# Altium PCB btn.PcbDoc
Units mil, origin at the board's own origin, x right, y up, seen from the top; angles counter-clockwise.
Board outline 6000 x 4000 mil, 2 copper layers (Top Layer, Bottom Layer); 16 components, 19 nets, 87 pads, 4 vias.
Unrouted connection lines stored in the file: 10.
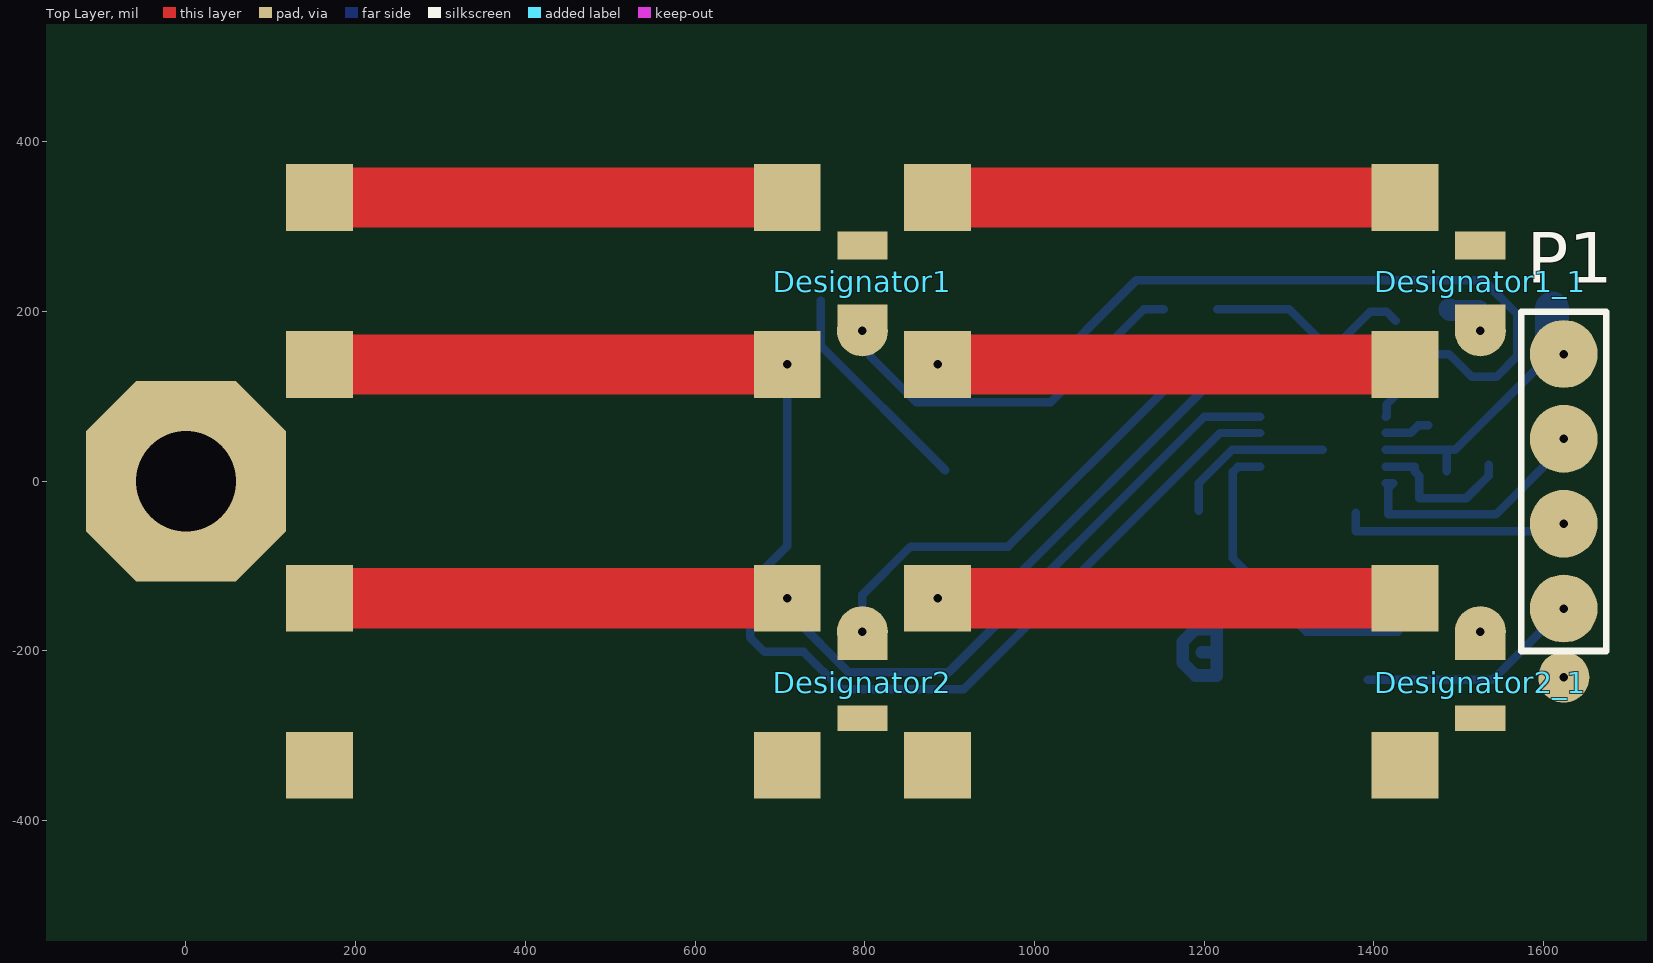
[diagram p0: Top Layer view]
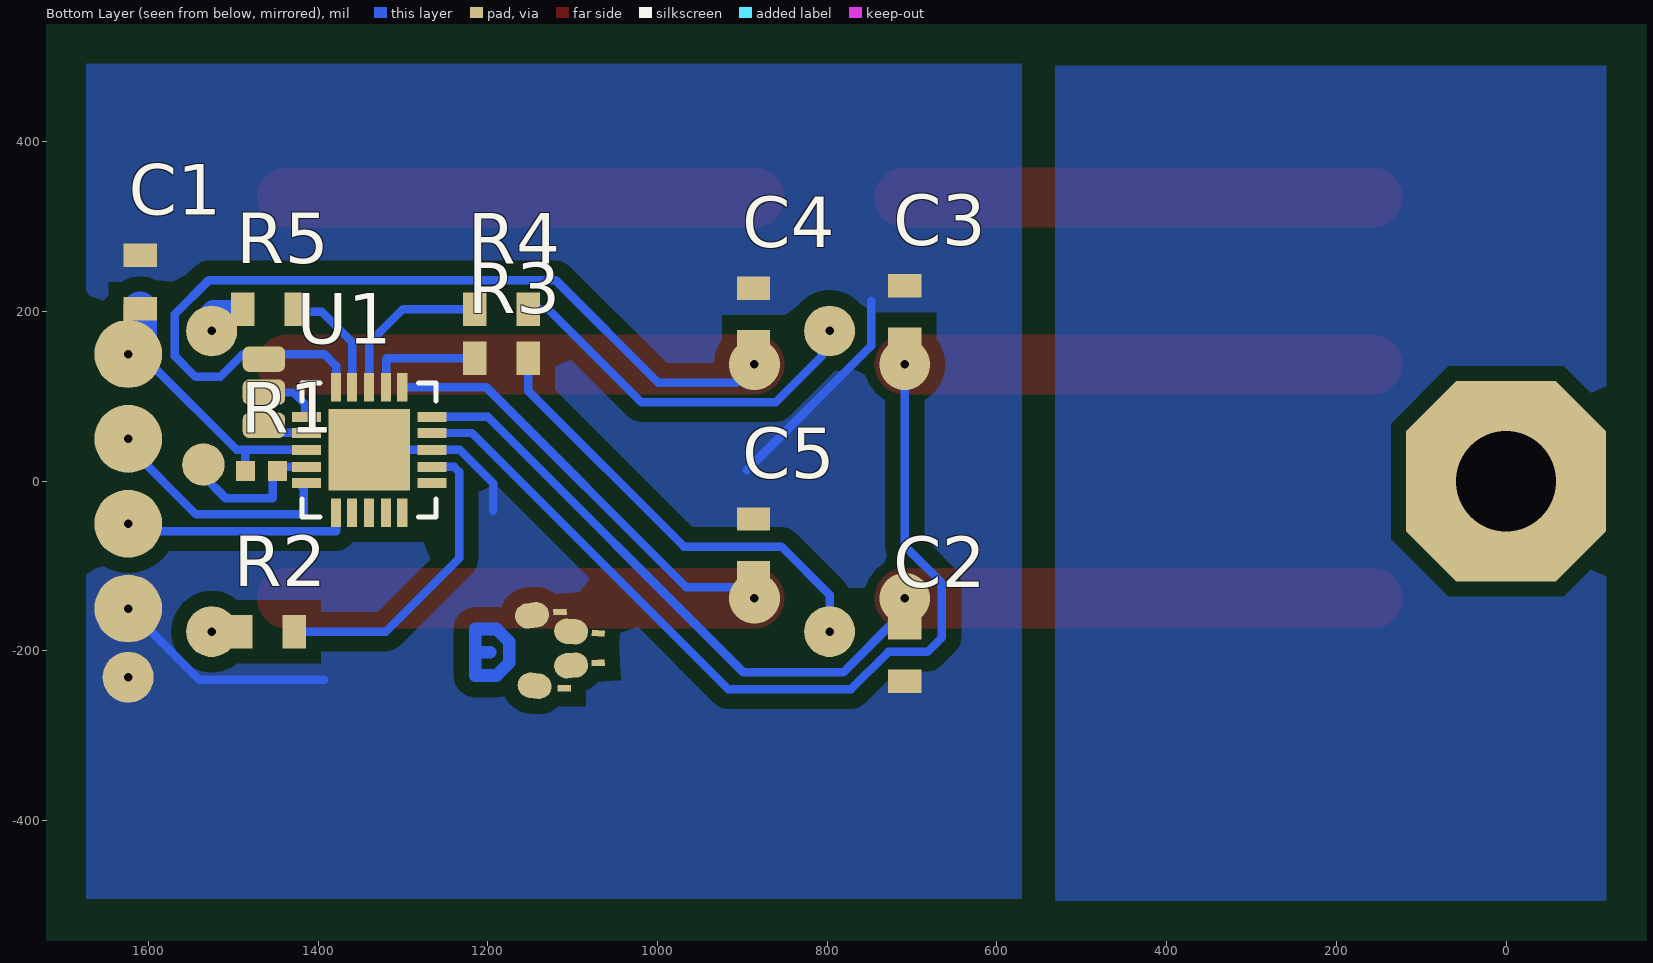
[diagram p1: Bottom Layer view, seen from below]

## Layer stack, top to bottom
Top Solder: solder mask 0.4, Solder Resist, Dk 3.5
Top Layer: signal copper 1.4
Dielectric 1: dielectric 12.6, FR-4, Dk 4.8
Bottom Layer: signal copper 1.4
Bottom Solder: solder mask 0.4, Solder Resist, Dk 3.5

## Board outline
-3970.47,-1017.72 2029.53,-1017.72 2029.53,2982.28 -3970.47,2982.28

## Design rules (kind name [scope] priority, off if disabled: settings)
Clearance [All] p1: gap=5 ignorepadtopadclearanceinfootprint=FALSE except(18: Arc-Fill Arc-Poly Arc-Region Track-Fill Track-Poly Track-Region SMDPad-Fill SMDPad-Poly SMDPad-Region THPad-Fill THPad-Poly THPad-Region Via-Fill Via-Poly Via-Region Fill-Fill Fill-Poly Fill-Region Poly-Poly Poly-Region Region-Region)
PolygonConnect [All] p1: connectstyle=Direct reliefconductorwidth=10 reliefentries=4 polygonreliefangle="90 Angle" airgapwidth=10
RoutingVias [All] p1: holewidth=28 width=50 viastyle="Through Hole" minholewidth=10 minwidth=50 maxholewidth=28 maxwidth=1000
SolderMaskExpansion [All] p1: expansion=4
Width [All] p1: maxlimit=500 minlimit=10 preferedwidth=10
30 further rules are at their usual default settings.

## Classes and differential pairs
component class btn: C1 C2 C3 C4 C5 P1 R1 R2 R3 R4 R5 U1

## Components (designator, comment, footprint, x,y, rotation, side; value= is the part's Value field where it differs from the comment)
C1 "Cap" 0603x 1610,235 r90 bottom value=100nF
C2 "Cap" 0603x 708.66,-204 r270 bottom value=100nF
C3 "Cap" 0603x 708.66,199 r90 bottom value=100nF
C4 "Cap" 0603x 887,196 r90 bottom value=100nF
C5 "Cap" 0603x 887,-76 r90 bottom value=100nF
Designator1 "Comment" 0805x 797.24,236.22 r90 top
Designator1_1 "Comment" 0805x 1525.59,236.22 r90 top
Designator2 "Comment" 0805x 797.24,-236.22 r90 top
Designator2_1 "Comment" 0805x 1525.59,-236.22 r90 top
P1 "Header 4" HDR1X4 1624.02,150 r270 top
R1 "" 0402x 1467.04,11.92 r180 bottom value=100
R2 "" 0603x 1460,-177.17 r0 bottom value=100
R3 "" 0603x 1184,145 r0 bottom value=100
R4 "" 0603x 1184,203 r0 bottom value=100
R5 "" 0603x 1457.5,203 r180 bottom value=100
U1 "ATTINY2313-20MU" *QFN50P400X400X80-21N 1340.04,36.92 r90 bottom

## Footprints (in the part's own frame and the unit in brackets; to place one, negate y for a bottom-side part, rotate by r counter-clockwise, add the part's x,y. Pads: shape width x height; smd on the part's side, far side on the other; paste and mask are expansions set on the pad)
0402x [mm] "Chip Capacitor, Body 1.0x0.5mm, IPC Medium Density"
  rect 0.57x0.6 smd: 1(-0.48,0) 2(0.48,0)
  body extent -0.5,-0.25 0.5,0.25, height 0.6
0603x [mm] "Chip Resistor; Body 1.6 x 0.8 mm (LxW typ)"
  rect 0.7x1 smd: 1(-0.8,0) 2(0.8,0)
0805x [mil] "Chip Resistor; Body 2 x 1.3 mm (LxW typ)"
  rect 33x59.06 smd: 1(42,0)
  rect 30x59.06 smd: 2(-43,0)
*QFN50P400X400X80-21N [mil]
  rect 34x12 smd: 1(-74,39) 2(-74,20) 3(-74,0) 4(-74,-20) 5(-74,-39) 11(74,-39) 12(74,-20) 13(74,0) 14(74,20) 15(74,39)
  rect 12x34 smd: 6(-39,-74) 7(-20,-74) 8(0,-74) 9(20,-74) 10(39,-74) 16(39,74) 17(20,74) 18(0,74) 19(-20,74) 20(-39,74)
  rect 96x96 smd: 21(0,0)
  silkscreen extent -79,-79 79,79
HDR1X4 [mil] "Connector; Header; 4 Position"
  round 80 hole 10: 1(0,0) 2(100,0) 3(200,0) 4(300,0)
  silkscreen extent -50,-50 350,50

## Part data
C1 C2 C3 C4 C5: "Capacitor", LatestRevisionDate=17-Jul-2002, LatestRevisionNote="Re-released for DXP Platform.", PackageDescription="Radial Cap, Thru-Hole; 2 Leads; 0.3 in Pin Spacing", PackageReference=RAD-0.3, Published=8-Jun-2000, Publisher="Altium Limited"
P1: "Header, 4-Pin", LatestRevisionDate=17-Jul-2002, LatestRevisionNote="Re-released for DXP Platform.", Publisher="Altium Limited"
R1 R2 R3 R4 R5: library part Res1, "Resistor", LatestRevisionDate=17-Jul-2002, LatestRevisionNote="Re-released for DXP Platform.", PackageDescription="Axial Device, Thru-Hole; 2 Leads; 0.3 in Pin Spacing", PackageReference=AXIAL-0.3, Published=8-Jun-2000, Publisher="Altium Limited"
U1: "ATtiny Series 20 MHz 2 KB Flash 128 B SRAM 8-Bit Microcontroller - QFN-20", Package="QFN-20 Microchip", Availability=Unavailable, MF=Microchip, MP=ATTINY2313-20MU, Price=None, SnapEDA_Link=https://www.snapeda.com/parts/ATTINY2313-20MU/Microchip/view-part/?ref=snap

## Free pads (board coordinates)
  oct 236.22x236.22 hole 118.11: 0(0,0)
  rect 15.75x7.87 smd far side rot 177: 0(1070,-214) 0(1115,-154)
  rect 15.75x7.87 smd far side rot 5: 0(1070,-179)
  oval 30x40 smd far side rot 85: 0(1102,-217)
  oval 30x40 smd far side rot 95: 0(1102,-177)
  rect 15.75x7.87 smd far side: 0(1110,-244)
  oval 30x40 smd far side rot 98: 0(1145,-241)
  oval 30x40 smd far side rot 82: 0(1148,-158)
  rect 78.74x78.74 smd: 1(708.66,334.65) 1(1437.01,334.65) 2(708.66,137.8) 2(1437.01,137.8) 3(708.66,-137.8) 3(1437.01,-137.8) 4(708.66,-334.65) 4(1437.01,-334.65) 5(157.48,-334.65) 5(885.83,-334.65) 6(157.48,-137.8) 6(885.83,-137.8) 7(157.48,137.8) 7(885.83,137.8) 8(157.48,334.65) 8(885.83,334.65)
  round 60 hole 10: 12(797.24,-177.17) 13(797.24,177.17) 14(1525.59,177.17) 14(1624.02,-231) 15(1525.59,-177.17)
  rrect50% 50x30 smd far side: 16(1464,66) 16(1464,105) 16(1464,144)
  round 50 smd far side: 16(1535.43,19.68)

## Via types
v1: diameter 60, hole 10, Top Layer to Bottom Layer, 4 vias

## Nets (pads, with @x,y where several pads share a name; then routed paths per layer and width w, separated by ;. In a path a pad name is that pad's centre, name@x,y a point inside that pad or via, vN(x,y) a via of type N, cw(c..) or ccw(c..) an arc to the next point about the centre after c; other vN are vias at no path point)
+5: C1.1 P1.1 R1.1 U1.18 | length 341.1
  Bottom Layer w10: U1.18 1485.94,36.92 ; R1.1 1485.94,36.92 ; P1.1 1610.62,136.61 1595.61,136.61 1495.92,36.92 1485.94,36.92
  Bottom Layer w40: C1.1 1610,174.84 1624.02,160.82 P1.1
B0: C2.1 pad.3@708.66,-137.8 pad.6@157.48,-137.8 U1.10 | length 1267.2
  Top Layer w70.87: pad.6@157.48,-137.8 v1(708.66,-137.8)
  Bottom Layer w10: v1@716.32,-145.45 716.32,-160.32 781,-225 899,-225 1199.92,75.92 U1.10
B1: C3.1 pad.2@708.66,137.8 pad.7@157.48,137.8 U1.9 | length 1642.4
  Top Layer w70.87: pad.7@157.48,137.8 v1(708.66,137.8)
  Bottom Layer w10: v1(708.66,137.8) 708.66,-76.34 665,-120 665,-184 682,-201 728,-201 772,-245 917,-245 1218.92,56.92 U1.9
B2: C4.1 pad.2@1437.01,137.8 pad.7@885.83,137.8 pad.16@1464,144 U1.15 | length 1601.8
  Top Layer w70.87: v1(885.83,137.8) pad.2@1437.01,137.8
  Bottom Layer w10: v1(885.83,137.8) 907.62,116 999,116 1120,237 1529,237 1569,197 1569,147.37 1544.63,123 1515.66,123 1488.66,150 1393,150 1379.04,136.04 U1.15
B3: C5.1 pad.3@1437.01,-137.8 pad.6@885.83,-137.8 U1.11 | length 1069.4
  Top Layer w70.87: v1(885.83,-137.8) pad.3@1437.01,-137.8
  Bottom Layer w10: v1(885.83,-137.8) 898.62,-125 966,-125 1201.92,110.92 U1.11
GND: C1.2 C2.2 C3.2 C4.2 C5.2 Designator1.1 Designator1_1.1 Designator2.2 Designator2_1.2 P1.4 pad.1 pad.4 pad.5 pad.8 pad.14@1624.02,-231 U1.8 U1.21 | length 1824.2
  Top Layer w70.87: pad.8@157.48,334.65 pad.1@708.66,334.65 ; pad.8@885.83,334.65 pad.1@1437.01,334.65
  Bottom Layer w10: 748,213 748,160 895,13 ; 1194,-35 1194,-2 1232.92,36.92 U1.8 U1.21 ; 1393,-234 1540.02,-234 P1.4
L0: Designator2.1 pad.12 R3.1 | length 536.7
  Bottom Layer w10: pad.12 797.24,-133.76 854,-77 969,-77 1152.5,106.5 R3.1
L1: Designator1.2 pad.13 R4.1 | length 447.6
  Bottom Layer w10: pad.13 806.81,167.6 806.81,147.19 861,93 1019,93 1129,203 R4.1
L2: Designator1_1.2 pad.14@1525.59,177.17 R5.1 | length 51.4
  Bottom Layer w10: pad.14@1517.76,185 pad.14@1525.59,177.17
  Bottom Layer w25: R5.1 1489,202.53 1490.28,201.25 1523.75,201.25 pad.14@1527,198
L3: Designator2_1.1 pad.15 R2.2
MISO: pad.16@1464,105 U1.16 | length 70.2
  Bottom Layer w10: U1.16 1414.57,75.92 1415.57,76.92 1415.57,91.06 1429.18,104.67 pad.16@1464,104.67
NetR1_2: pad.16@1535.43,19.68 R1.2 U1.19 | length 179.3
  Bottom Layer w10: U1.19 1448.15,16.92 R1.2 1453.66,6.41 1453.66,-20 1509,-20 1535.43,6.43 pad.16@1535.43,19.68
NetR2_1: R2.1 U1.7 | length 366.7
  Bottom Layer w10: U1.7 1239.92,16.92 1234,11 1234,-91 1320.17,-177.17 R2.1
NetR3_2: R3.2 U1.12 | length 138
  Bottom Layer w10: R3.2 1319,145 1320.04,143.96 U1.12
NetR4_2: R4.2 U1.13 | length 193.2
  Bottom Layer w10: R4.2 1300,203 1340.04,162.96 U1.13
NetR5_2: R5.2 U1.14 | length 138.5
  Bottom Layer w10: U1.14 1360.04,164.04 1396,200 1415.01,200 R5.2@1426.01,189
RXD: P1.2 U1.20 | length 296.9
  Bottom Layer w10: U1.20 1422.91,-2.08 1417.32,-7.66 1417.32,-39 1544,-39 1623.3,40.3 1623.3,49.28 P1.2
SCK: pad.16@1464,66 U1.17 | length 53.7
  Bottom Layer w10: U1.17 1414.16,57.03 1443.68,57.03 1452.65,66 pad.16@1464,66
TXD: P1.3 U1.1 | length 270.6
  Bottom Layer w10: U1.1 1379.04,-59 1615.02,-59 P1.3
pads on no net: U1.2 U1.3 U1.4 U1.5 U1.6
copper on no net: | length 189.9
  Bottom Layer w15: 1197.5,-201.5 1215,-201.5 ; 1175,-214 1190,-229 1215,-229 1215,-174 1190,-174 1175,-189 1175,-214

## Polygon pours and split planes (outlines as drawn)
no net on Bottom Layer "Top Layer-No Net" (solid, pour order 6): -118.11,490.05 -118.11,-494.2 531.5,-494.2 531.5,490.05
GND on Bottom Layer "Top Layer-No Net" (solid, remove dead copper, pour order 4): 570.87,492.13 570.87,-492.13 1673.23,-492.13 1673.23,492.13